# Altium PCB DriverBoard.PcbDoc
Units mil, origin at the board's own origin, x right, y up, seen from the top; angles counter-clockwise.
Board outline 6000 x 4000 mil, 2 copper layers (Top Layer, Bottom Layer); 43 components, 27 nets, 116 pads, 0 vias.
Unrouted connection lines stored in the file: 73.
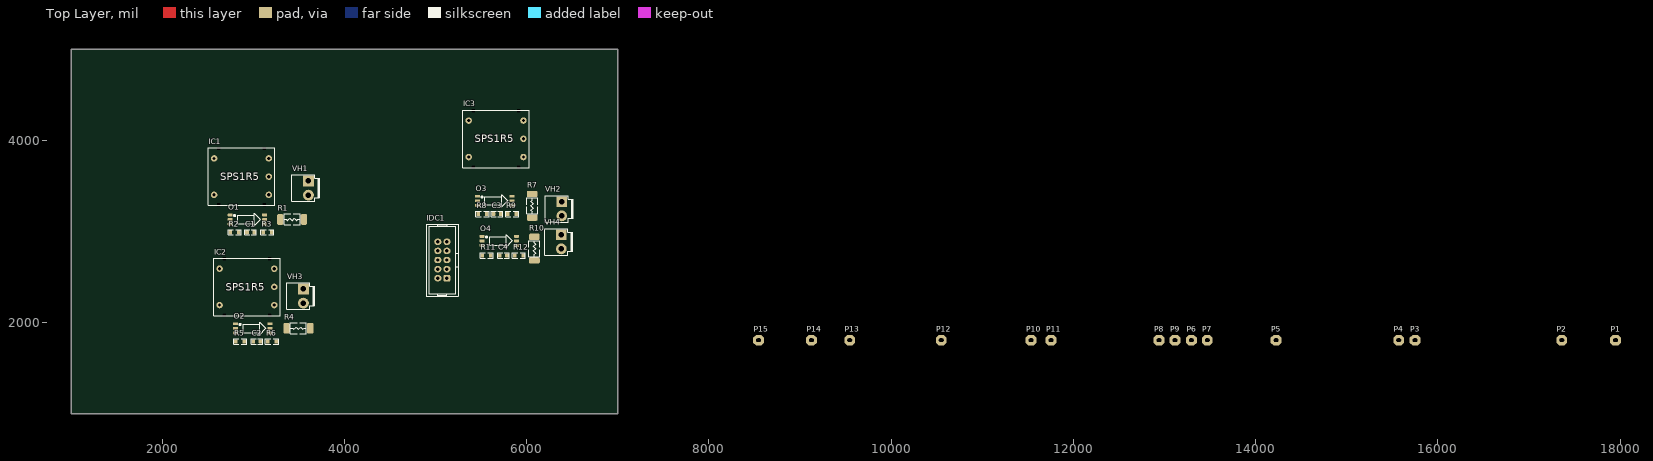
[diagram p0: Top Layer view]
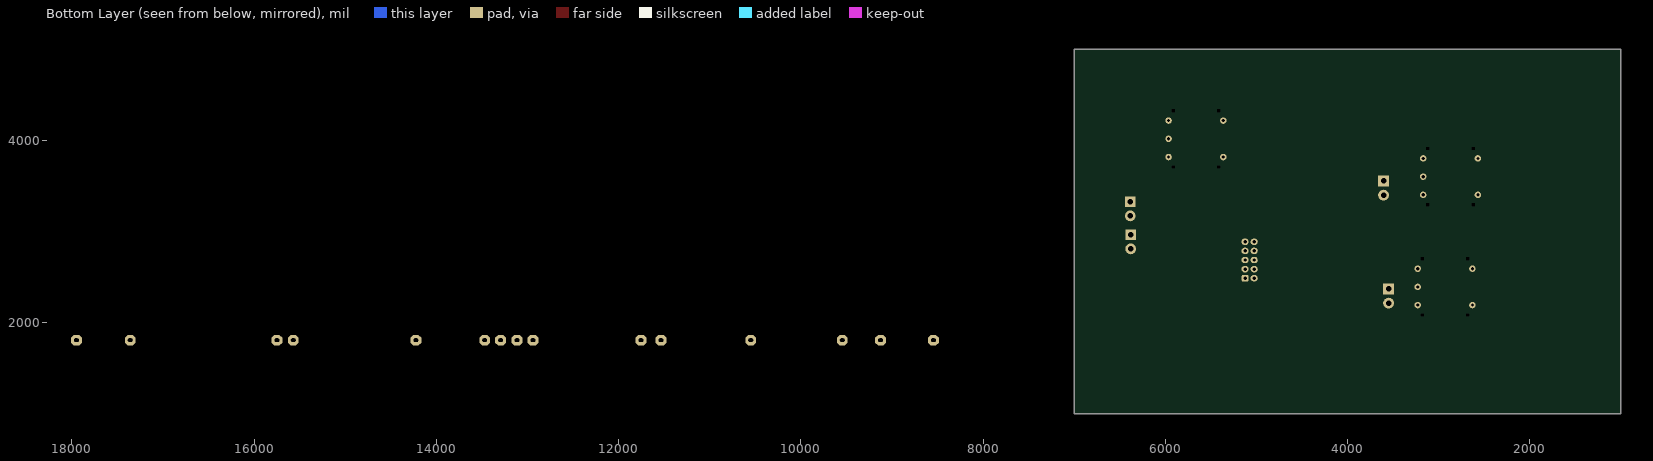
[diagram p1: Bottom Layer view, seen from below]

## Layer stack, top to bottom
Top Solder: solder mask 0.4, Solder Resist, Dk 3.5
Top Layer: signal copper 1.4
Dielectric 1: dielectric 12.6, FR-4, Dk 4.8
Bottom Layer: signal copper 1.4
Bottom Solder: solder mask 0.4, Solder Resist, Dk 3.5

## Board outline
1000,1000 7000,1000 7000,5000 1000,5000

## Design rules (kind name [scope] priority, off if disabled: settings)
Clearance [All] p1: gap=10 ignorepadtopadclearanceinfootprint=FALSE except(0: Arc-Hole Track-Hole SMDPad-Hole THPad-Hole Via-Hole Fill-Hole Poly-Hole Region-Hole Text-Hole)
PolygonConnect [All] p1: connectstyle=Relief reliefconductorwidth=10 reliefentries=4 polygonreliefangle="90 Angle" airgapwidth=10
RoutingVias [All] p1: holewidth=28 width=50 viastyle="Through Hole" minholewidth=28 minwidth=50 maxholewidth=28 maxwidth=50
SolderMaskExpansion [All] p1: expansion=4 istentingtop=FALSE
Width [All] p1: maxlimit=10 minlimit=10 preferedwidth=10
30 further rules are at their usual default settings.

## Components (designator, comment, footprint, x,y, rotation, side; value= is the part's Value field where it differs from the comment)
C1 "0.1uF" cap_0805 2970,2990 r180 top
C2 "0.1uF" cap_0805 3040,1790 r180 top
C3 "0.1uF" cap_0805 5675,3190 r180 top
C4 "0.1uF" cap_0805 5745,2735 r180 top
IC1 "SPD1R5-5-1515" SPS1R5 2505.83,3285.04 r0 top
IC2 "SPD1R5-5-1515" SPS1R5 2565.83,2075.04 r0 top
IC3 "SPD1R5-5-1515" SPS1R5 5300,3700 r0 top
IDC1 "IDC 2x5" "IDC 2x5" 5125,2384.99 r90 top value=IDC_2X10
O1 "TLP5754" TLP5754 2935,3130 r0 top
O2 "TLP5754" TLP5754 2995,1935 r0 top
O3 "TLP5754" TLP5754 5650,3335 r0 top
O4 "TLP5754" TLP5754 5700,2895 r0 top
P1 "test PCB" tp_red_1p 17950,1805 r0 top
P2 "test PCB" Tp_black_1p 17360,1805 r0 top
P3 "test PCB" tp_white_1p 15750,1805 r0 top
P4 "test PCB" tp_white_1p 15570,1805 r0 top
P5 "test PCB" tp_white_1p 14225,1805 r0 top
P6 "test PCB" tp_red_1p 13295,1805 r0 top
P7 "test PCB" Tp_black_1p 13470,1805 r0 top
P8 "test PCB" tp_red_1p 12940,1805 r0 top
P9 "test PCB" Tp_black_1p 13115,1805 r0 top
P10 "test PCB" tp_red_1p 11535,1805 r0 top
P11 "test PCB" Tp_black_1p 11755,1805 r0 top
P12 "test PCB" Tp_blue_1p 10550,1805 r0 top
P13 "test PCB" Tp_blue_1p 9545,1805 r0 top
P14 "test PCB" Tp_blue_1p 9125,1805 r0 top
P15 "test PCB" Tp_blue_1p 8545,1805 r0 top
R1 "8R2 1W" R2512 3425,3130 r0 top
R2 "150R" R0805 2795,2990 r180 top
R3 "10K" R0805 3155,2990 r0 top
R4 "8R2 1W" R2512 3495,1935 r0 top
R5 "150R" R0805 2855,1790 r180 top
R6 "10K" R0805 3205,1790 r0 top
R7 "8R2 1W" R2512 6060,3280 r270 top
R8 "150R" R0805 5515,3190 r180 top
R9 "10K" R0805 5840,3190 r0 top
R10 "8R2 1W" R2512 6085,2810 r90 top
R11 "150R" R0805 5560,2735 r180 top
R12 "10K" R0805 5915,2735 r0 top
VH1 "HHDR_2" VH-2 3605,3475 r270 top
VH2 "HHDR_2" VH-2 6385,3247.05 r270 top
VH3 "HHDR_2" VH-2 3550,2290 r270 top
VH4 "HHDR_2" VH-2 6380,2885 r270 top

## Footprints (in the part's own frame and the unit in brackets; to place one, negate y for a bottom-side part, rotate by r counter-clockwise, add the part's x,y. Pads: shape width x height; smd on the part's side, far side on the other; paste and mask are expansions set on the pad)
cap_0805 [mm] "CHIP Capacitor, 2.0X1.3mm, 0805"
  rrect50% 1x1.2 smd mask+0.075: 1(-1,0) 2(1,0)
  silkscreen extent -1.64,-0.74 1.64,0.74, body extent -1,-0.62 1,0.63, height 1
"IDC 2x5" [mm]
  rrect50% 1.8x2 hole 0.95 mask+0.1: 1(2.54,0)
  oval 1.8x2 hole 0.95 mask+0.1: 2(2.54,2.54) 3(5.08,0) 4(5.08,2.54) 5(7.62,0) 6(7.62,2.54) 7(10.16,0) 8(10.16,2.54) 9(12.7,0) 10(12.7,2.54)
  silkscreen extent -2.41,-3.11 17.65,5.72, body extent -2.54,-3.28 17.78,5.82, height 9
R0805 [mm] "0.125W 1/8W"
  rrect50% 1x1.2 smd mask+0.05: 1(-1.191,0) 2(1.191,0)
  silkscreen extent -1.83,-0.74 1.83,0.74, body extent -1.15,-0.67 1.15,0.67, height 0.76
R2512 [mm] "CHIP RESISTOR 1WATT 2512"
  rrect50% 1.8x3 smd mask+0.05: 1(-3.287,0) 2(3.298,0.022)
  silkscreen extent -2.22,-1.52 2.22,1.55, body extent -3.15,-1.6 3.15,1.6, height 0.66
SPS1R5 [mm] "SPS1R5"
  round 1.8 hole 0.9: 1(1.63,13.08) 2(1.63,2.92) 3(16.87,2.92) 4(16.87,8) 5(16.87,13.08)
  round 0 hole 0.8 square: ""(2.9,0.15) ""(2.9,15.85) ""(15.6,0.15) ""(15.6,15.85)
  silkscreen extent 0,0 18.5,16
TLP5754 [mm] "TLP5754"
  rrect50% 1.4x0.8 smd: 1(-4.8,1.27) 2(-4.8,0) 3(-4.8,-1.27) 4(4.8,-1.27) 5(4.8,0) 6(4.8,1.27)
  silkscreen extent -3.76,-1.75 3.63,1.75, body extent -5,-1.92 5,1.92, height 2.2
Tp_black_1p [mm]
  oct 3x3 hole 1 slot 1.3 at 0 deg: 1(0,0)
  body extent -1.15,-1.15 1.15,1.15, height 5
Tp_blue_1p [mm]
  oct 3x3 hole 1 slot 1.3 at 0 deg: 1(0,0)
  body extent -1.15,-1.15 1.15,1.15, height 5
tp_red_1p [mm]
  oct 3x3 hole 1 slot 1.3 at 0 deg: 1(0,0)
  body extent -1.15,-1.15 1.15,1.15, height 5
tp_white_1p [mm]
  oct 3x3 hole 1 slot 1.3 at 0 deg: 1(0,0)
  body extent -1.15,-1.15 1.15,1.15, height 5
VH-2 [mm] "PW10-xx-M, JST-BxB-XH-A pitch: 2.5mm"
  rect 3x3 hole 1.5: 1(-1.98,0)
  round 3 hole 1.5: 2(1.98,0)
  silkscreen extent -3.68,-4.64 3.68,3.24, body extent -3.93,-4.8 3.93,3.7, height 10.9

## Part data
C1 C2 C3 C4: library part "CAP SMD", "CAP SMD", ASSEMBLY=ASSEMBLY, MANF=-, MANF_P#=MANF_PART#, PARAM="-, -%", PARAM2=-V, PRICE="100= 1$"
IC1 IC2 IC3: "Power supply Driver SPD1R5-5-1515 / Efficiency 80% / Input 0.381A / Output 50mA"
IDC1: "IDC 2x5 2.54"
O1 O2 O3 O4: Package="DIP-8 Toshiba", Availability="In Stock", Check_prices=https://www.snapeda.com/parts/TLP250/Toshiba+Semiconductor+and+Storage/view-part/?ref=eda, MF="Toshiba Semiconductor", MP=TLP250, PRICE=None, Purchase-URL=https://pricing.snapeda.com/search/part/TLP250/?ref=eda, SnapEDA_Link=https://www.snapeda.com/parts/TLP250/Toshiba+Semiconductor+and+Storage/view-part/?ref=snap
P1 P2 P3 P4 P5 P6 P7 P8 P9 P10 P11 P12 P13 P14 P15: "testpin"
R1 R2 R3 R4 R5 R6 R7 R8 R9 R10 R11 R12: library part "RES SMD", "RES SMD", ASSEMBLY=ASSEMBLY, DESC=DESCRIPTION, DIST#=MOUSER, MANF=VISHAY, MANF_P#=WSLP0805R0100FEA, PARAM="0.5W, -55~155oC", PARAM2=1%, PRICE=0.5$
VH1 VH2 VH3 VH4: library part VH-2, "VH-2"

## Nets (pads, with @x,y where several pads share a name; then routed paths per layer and width w, separated by ;. In a path a pad name is that pad's centre, name@x,y a point inside that pad or via, vN(x,y) a via of type N, cw(c..) or ccw(c..) an arc to the next point about the centre after c; other vN are vias at no path point)
+5: IC1.1 IC2.1 IC3.1 IDC1.1 IDC1.2 P1.1
COM1: IC1.4 P3.1
COM2: IC2.4 P4.1
COM3: IC3.4 P5.1
GND: IC1.2 IC2.2 IC3.2 IDC1.4 IDC1.6 IDC1.8 IDC1.10 P2.1 R2.1 R5.1 R8.1 R11.1
NetIDC1_3: IDC1.3 O1.1
NetIDC1_5: IDC1.5 O3.1
NetIDC1_7: IDC1.7 O2.1
NetIDC1_9: IDC1.9 O4.1
NetO1_3: O1.3 R2.2
NetO1_5: O1.5 R1.1
NetO2_3: O2.3 R5.2
NetO2_5: O2.5 R4.1
NetO3_3: O3.3 R8.2
NetO3_5: O3.5 R7.1
NetO4_3: O4.3 R11.2
NetO4_5: O4.5 R10.1
NetP12_1: P12.1 R1.2 R3.2 VH1.1
NetP13_1: P13.1 R7.2 R9.2 VH2.1
NetP14_1: P14.1 R4.2 R6.2 VH3.1
NetP15_1: P15.1 R10.2 R12.2 VH4.1
VDD1: C1.2 IC1.5 O1.6 P6.1
VDD2: C2.2 IC2.5 O2.6 P8.1
VDD3: C3.2 C4.2 IC3.5 O3.6 O4.6 P10.1
VSS1: C1.1 IC1.3 O1.4 P7.1 R3.1 VH1.2
VSS2: C2.1 IC2.3 O2.4 P9.1 R6.1 VH3.2
VSS3: C3.1 C4.1 IC3.3 O3.4 O4.4 P11.1 R9.1 R12.1 VH2.2 VH4.2
pads on no net: IC1. IC2. IC3. O1.2 O2.2 O3.2 O4.2

## Text inside footprints (layer, text, board x,y; h text height)
IC1: Top Overlay "SPS1R5" at 2635.51,3559.72 h78.74
IC2: Top Overlay "SPS1R5" at 2695.51,2349.72 h78.74
IC3: Top Overlay "SPS1R5" at 5429.69,3974.68 h78.74